# Altium PCB remote.PcbDoc (part 1 of 2)
Units mm, origin at the board's own origin, x right, y up, seen from the top; angles counter-clockwise.
Board outline 152.4 x 101.6 mm, 2 copper layers (Top Layer, Bottom Layer); 61 components, 51 nets, 242 pads, 145 vias.
Unrouted connection lines stored in the file: 18.
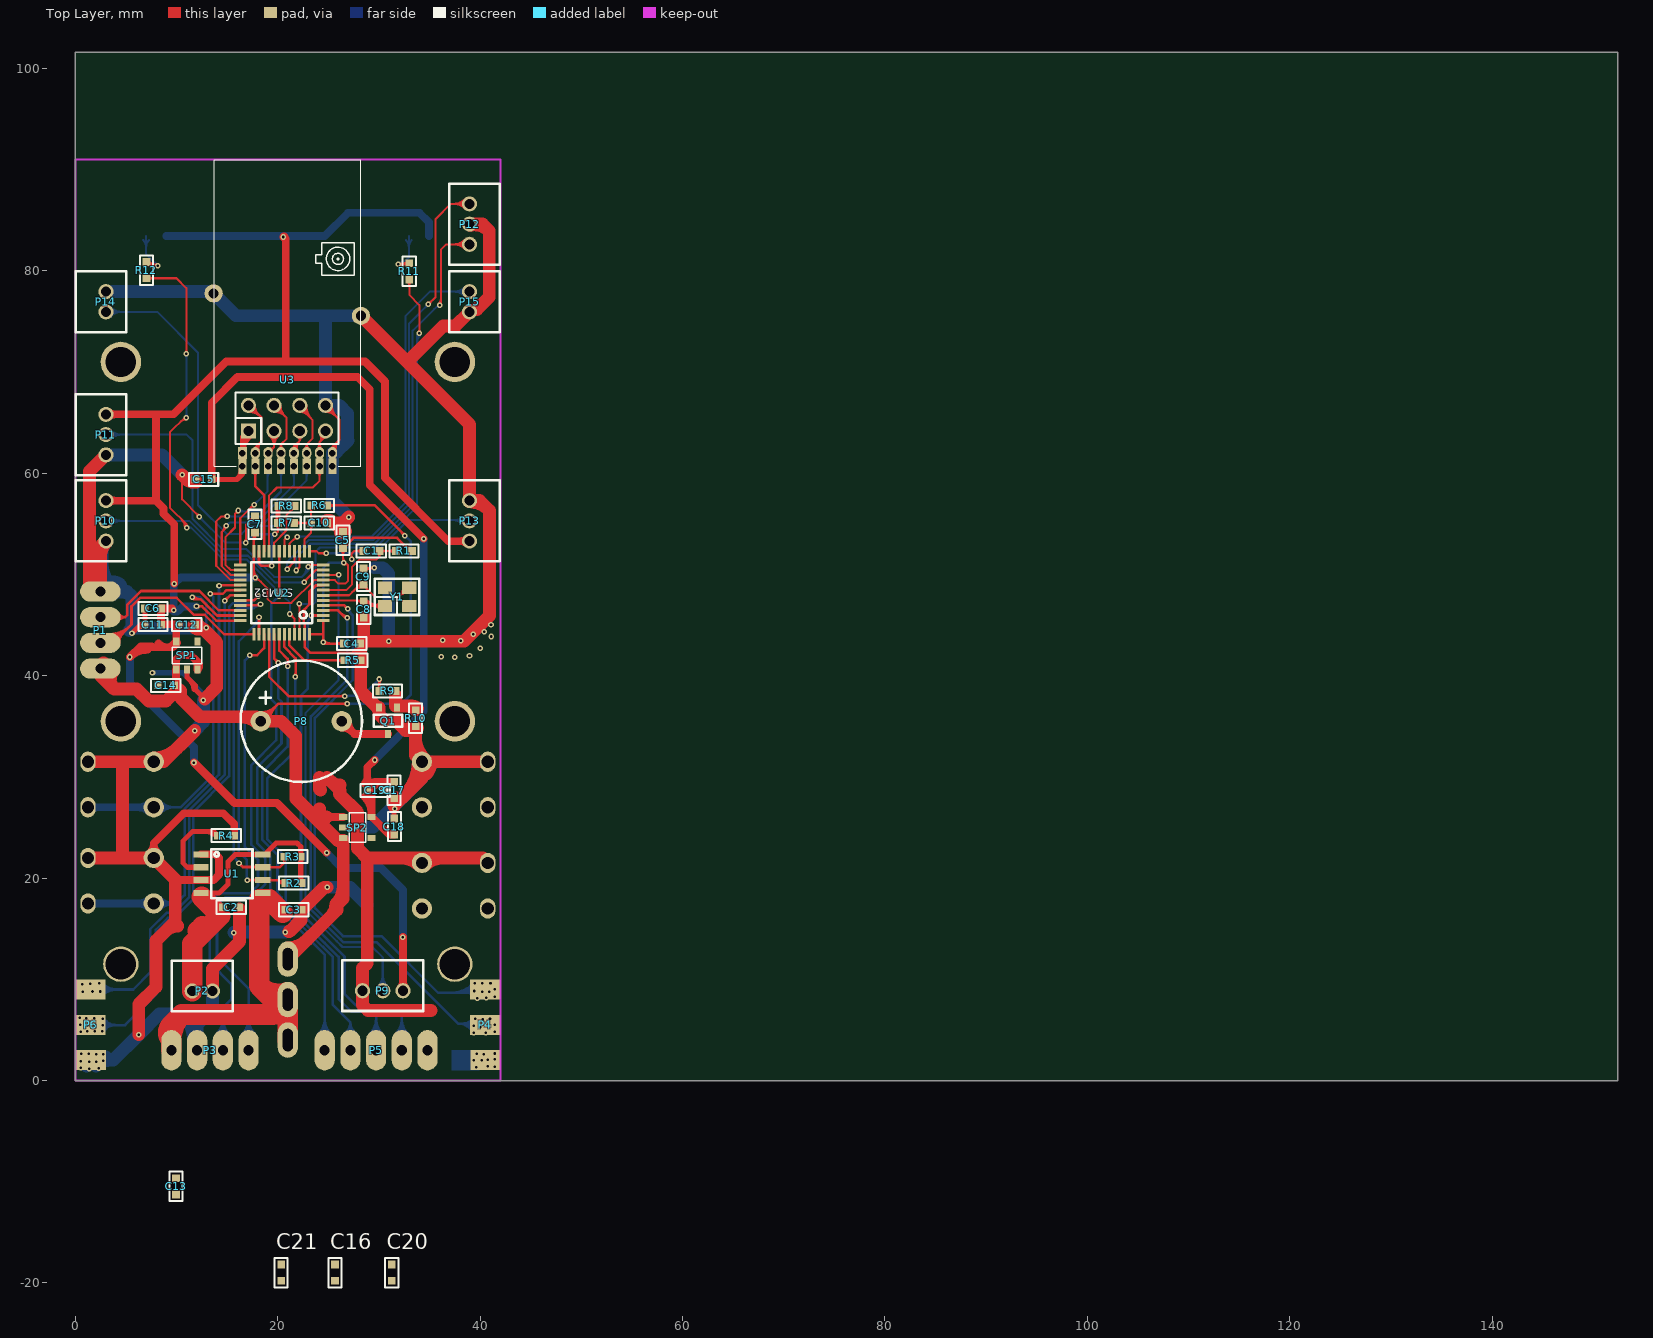
[diagram p0: Top Layer view]
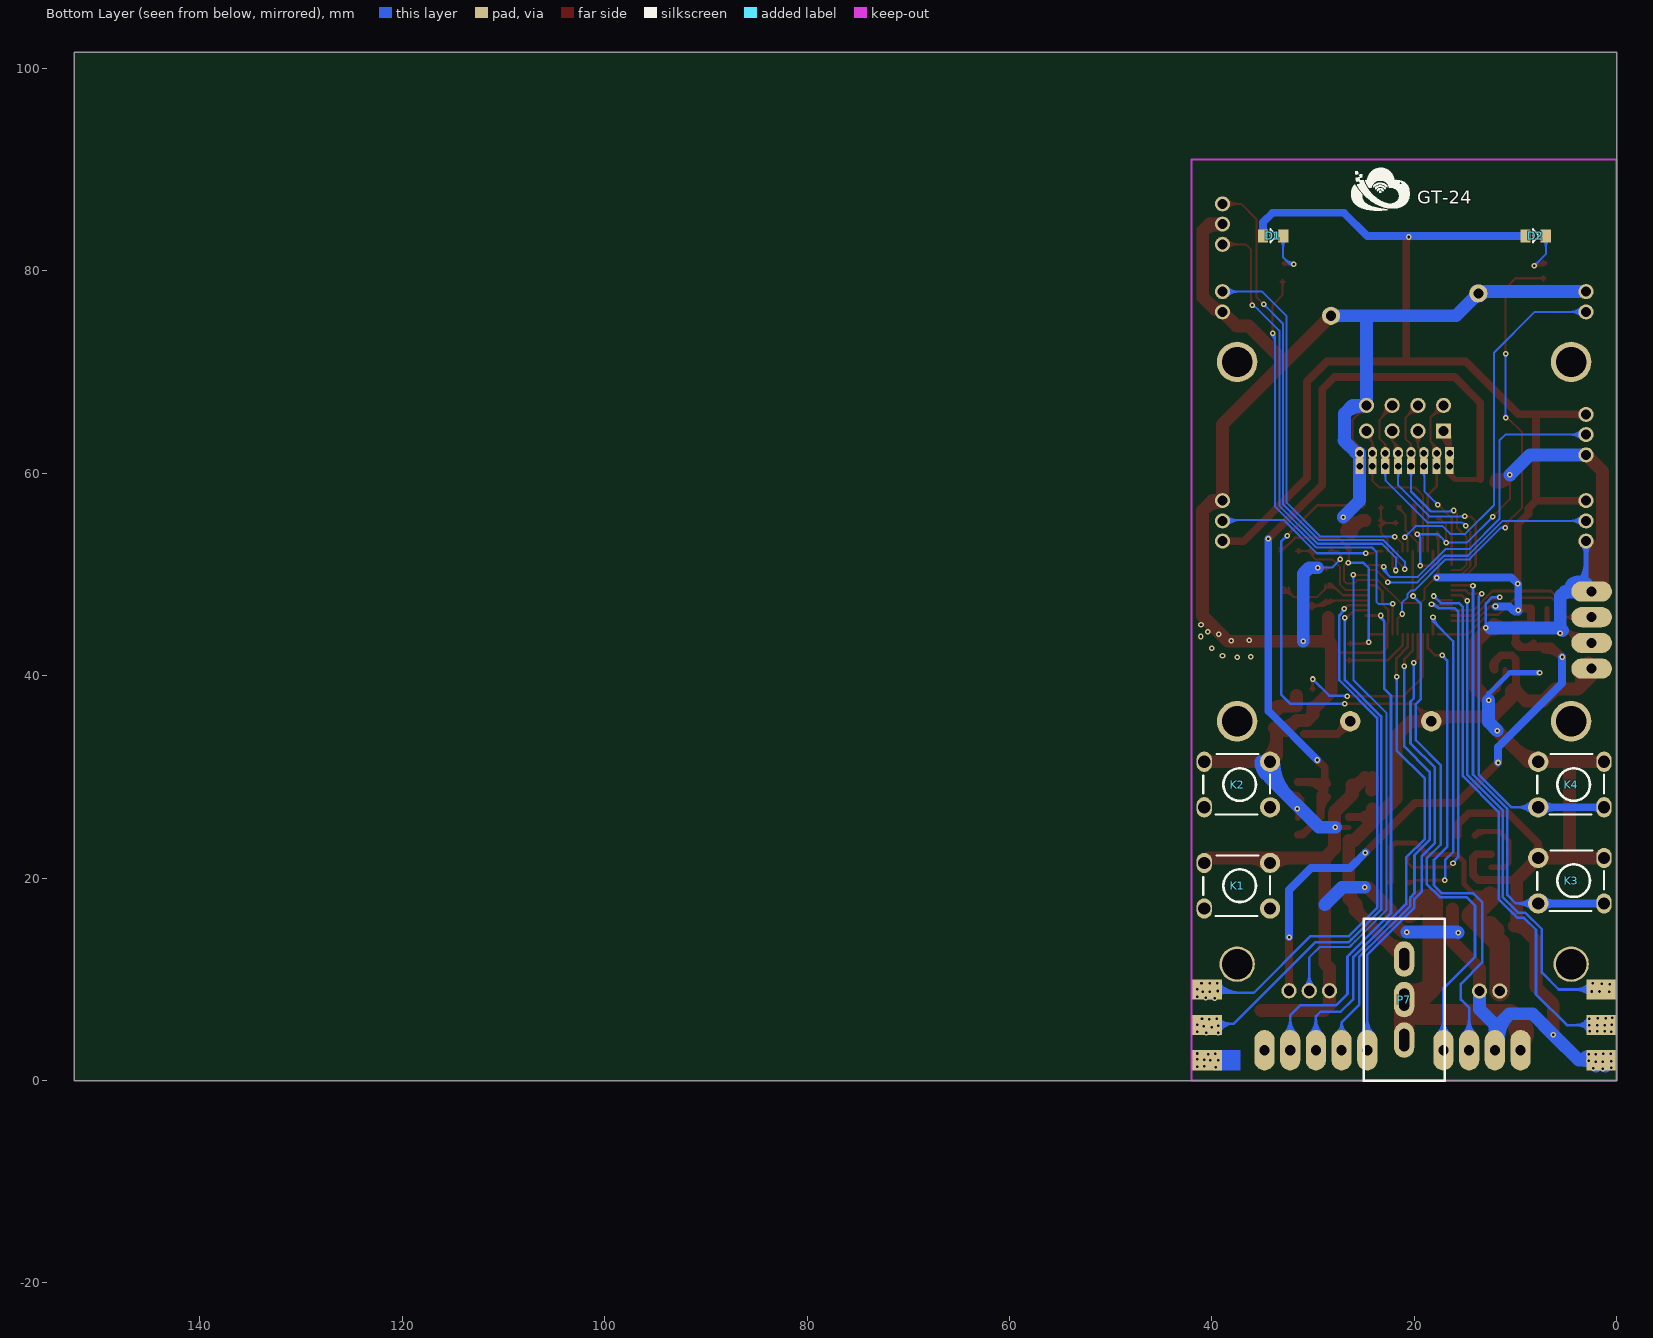
[diagram p1: Bottom Layer view, seen from below]

## Layer stack, top to bottom
Top Layer: signal copper 0.0356
Dielectric: dielectric 0.32, FR-4, Dk 4.8
Bottom Layer: signal copper 0.0356

## Board outline
0,0 152.4,0 152.4,101.6 0,101.6

## Design rules (kind name [scope] priority, off if disabled: settings)
AssemblyTestPointUsage [All] p1 off:
AssemblyTestpoint [All] p1 off: testpointundercomponent=TRUE minsize=1.016 maxsize=2.54 preferedsize=1.524 minholesize=0 maxholesize=1.016 preferedholesize=0.813 testpointgrid=0.025 usegrid=TRUE gridtolerance=0 allowsidetop=TRUE allowsidebottom=TRUE
Clearance [All] p1: gap=0.152
ComponentClearance [All] p1 off: gap=0.254 collisioncheckmode=3 verticalgap=0.254 showdistances=FALSE
FabricationTestPointUsage [All] p1 off: valid=0 allowmultiple=FALSE
FabricationTestpoint [All] p1 off: side=3 testpointundercomponent=TRUE minsize=1.016 maxsize=2.54 preferedsize=1.524 minholesize=0 maxholesize=1.016 preferedholesize=0.813 testpointgrid=0.025 allowsidetop=TRUE allowsidebottom=TRUE usegrid=TRUE gridtolerance=0
Height [All] p1 off: minheight=0 maxheight=25.4 prefheight=12.7
HoleSize [All] p1 off: absolutevalues=TRUE maxlimit=2.54 minlimit=0.025 maxpercent=80.000 minpercent=20.000
HoleToHoleClearance [All] p1 off: gap=0.025 allowstackedmicrovias=TRUE
LayerPairs [All] p1 off: enforce=TRUE
MinimumSolderMaskSliver [All] p1 off: minsoldermaskwidth=0.025
NetAntennae [All] p1 off: netantennaetolerance=0
PolygonConnect [All] p1: connectstyle=Relief reliefconductorwidth=0.254 reliefentries=4 polygonreliefangle="90 Angle" airgapwidth=0.254
RoutingVias [All] p1: holewidth=0.25 width=0.55 viastyle="Through Hole" minholewidth=0.25 minwidth=0.55 maxholewidth=0.711 maxwidth=1.27
SilkToSilkClearance [All] p1 off: silktosilkclearance=0.254
SilkToSolderMaskClearance [IsPad] p1 off: minsilkscreentomaskgap=0.025 clearancetoexposedcopper=TRUE
SolderMaskExpansion [All] p1: expansion=0.102
Width [All] p1: maxlimit=2.54 minlimit=0.178 preferedwidth=0.178 minimp=50.000000 maximp=50.000000 favimp=50.000000
15 further rules are at their usual default settings.

## Components (designator, comment, footprint, x,y, rotation, side; value= is the part's Value field where it differs from the comment)
C1 "C10uF" 0603C 30.05,52.325 r180 top
C2 "C10uF" 0603C 14.6,17.125 r0 top
C3 "C10uF" 0603C 20.775,16.875 r0 top
C4 "C0.1uF" 0603C 28.125,43.175 r180 top
C5 "C0.1uF" 0603C 26.45,54.2 r270 top
C6 "C0.1uF" 0603C 6.875,46.65 r0 top
C7 "C0.1uF" 0603C 17.75,55.75 r270 top
C8 "C22pF" 0603R 28.5,45.75 r90 top
C9 "C22pF" 0603R 28.475,50.6 r270 top
C10 "C10uF" 0603C 23.3,55.1 r0 top
C11 "C0.1uF" 0603C 6.875,45.05 r0 top
C12 "C10uF" 0603C 10.225,45.05 r0 top
C13 "22uF" 0603C 9.95,-9.65 r270 top
C14 "22uF" 0603C 9.75,39.05 r180 top
C15 "C0.1uF" 0603C 11.875,59.4 r0 top
C16 "C10uF" 0603C 25.665,-19.783 r90 top
C17 "C0.1uF" 0603C 31.5,27.9 r90 top
C18 "C10uF" 0603C 31.525,24.3 r90 top
C19 "22uF" 0603C 28.85,28.675 r0 top
C20 "22uF" 0603C 31.265,-19.783 r90 top
C21 "C10uF" 0603C 20.34,-19.783 r90 top
D1 "LED" LED 34.95,83.45 r180 bottom locked
D2 "LED" LED 9,83.45 r180 bottom locked
K1 "KEY-PB" SW-DIP#1 40.75,17 r0 bottom locked
K2 "KEY-PB" SW-DIP#1 40.75,27 r0 bottom locked
K3 "KEY-PB" SW-DIP#2 7.75,17.5 r0 bottom locked
K4 "KEY-PB" SW-DIP#2 7.75,27 r0 bottom locked
P1 "Head*4" Head4_SPE4 2.475,48.325 r270 top
P2 "Head2" HEAD-2P-2.0 11.55,8.85 r0 top locked
P3 "Head*4" Head4_SPE4 9.5,3 r0 top locked
P4 "head*3" KEY_SPE2 40.5,2 r0 top locked
P5 "HEAD5" HEAD5_SPE5 24.64,3 r0 top locked
P6 "head*3" KEY_SPE2 1.5,2 r0 top locked
P7 "head*3" SWITCH_3P 21,4 r180 bottom locked
P8 "Head2" BEEP 18.325,35.5 r0 top
P9 "head*3" HEAD-3P-2.0 28.375,8.875 r0 top locked
P10 "head*3" HEAD-3P-2.0 3.025,53.3 r90 top locked
P11 "head*3" HEAD-3P-2.0 3.025,61.825 r90 top locked
P12 "head*3" HEAD-3P-2.0 38.95,86.625 r270 top locked
P13 "head*3" HEAD-3P-2.0 38.95,57.3 r270 top locked
P14 "Head2" HEAD-2P-2.0 3.025,75.95 r90 top locked
P15 "Head2" HEAD-2P-2.0 38.95,77.95 r270 top locked
Q1 "SI2302" SOT-23-3 31.8,36.85 r180 top
R1 "R10K" 0603R 31.675,52.325 r0 top
R2 "R1K" 0603R 20.775,19.512 r0 top
R3 "R1K" 0603R 20.675,22.125 r0 top
R4 "1K" 0603R 15.7,24.2 r180 top
R5 "R10K" 0603R 26.6,41.525 r0 top
R6 "R10K" 0603R 24.9,56.825 r180 top
R7 "R10K" 0603R 20.025,55.1 r0 top
R8 "1K" 0603R 20.05,56.775 r0 top
R9 "R100R" 0603R 31.65,38.5 r180 top
R10 "R10K" 0603R 33.625,36.6 r270 top
R11 "R1K" 0603R 33,80.75 r270 top
R12 "R1K" 0603R 7.025,80.875 r270 top
SP1 "SP6201-adj" SOT23-5 9.975,40.6 r0 top
SP2 "SP6201-adj" SOT23-5 26.475,26.05 r270 top
U1 "TP4056" SOP-8 12.425,22.35 r0 top
U2 "STM32F103C8T6" STM32C8T6 19.55,46.3 r0 top
U3 "NRF_PA" NRF_PA 17.1,64.175 r0 top locked
Y1 "12M" XTAL3225 30.6,46.9 r0 top

## Footprints (in the part's own frame and the unit in brackets; to place one, negate y for a bottom-side part, rotate by r counter-clockwise, add the part's x,y. Pads: shape width x height; smd on the part's side, far side on the other; paste and mask are expansions set on the pad)
0603C [mil]
  rect 30x30 smd: 1(0,0) 2(62.99,0)
  silkscreen extent -26,-26 89,26
0603R [mil]
  rect 30x30 smd: 1(0,0) 2(62.99,0)
  silkscreen extent -26,-26 89,26
BEEP [mm]
  round 2 hole 1: 1(0,0) 2(8,0)
  silkscreen extent -2,-6 10,6
Head4_SPE4 [mm]
  oval 2x4 hole 1: 1(0,0) 2(2.54,0) 3(5.08,0) 4(7.62,0)
HEAD5_SPE5 [mm]
  oval 2x4 hole 1: 1(0,0) 2(2.54,0) 3(5.08,0) 4(7.62,0) 5(10.16,0)
HEAD-2P-2.0 [mm]
  round 1.5 hole 1: 1(0,0) 2(2,0)
  silkscreen extent -2,-2 4,3
HEAD-3P-2.0 [mm]
  round 1.5 hole 1: 1(0,0) 2(2,0) 3(4,0)
  silkscreen extent -2,-2 6,3
KEY_SPE2 [mm]
  rect 3x2 smd far side: 1(0,0) 2(0,3.5) 3(0,7)
  rect 3x2 smd: 1(0.05,0.025) 2(0,3.5) 3(0,7)
LED [mil]
  rect 40x50 smd: 1(0,0) 2(78.74,0)
  silkscreen extent 29,-25 49,27
NRF_PA [mm]
  rect 0.8x1.5 hole 0.65: 1(-0.585,-3.48) 2(0.685,-3.48) 3(1.955,-3.48) 4(3.225,-3.48) 5(4.495,-3.48) 6(5.765,-3.48) 7(7.035,-3.48) 8(8.305,-3.48)
  rect 0.9x1.2 hole 0.65: 1(-0.585,-2.18)
  rect 1.5x1.5 hole 1: 1(0,0)
  round 1.5 hole 1: 2(0,2.54) 3(2.54,0) 4(2.54,2.54) 5(5.08,0) 6(5.08,2.54) 7(7.62,0) 8(7.62,2.54)
  oval 0.9x1.2 hole 0.65: 2(0.685,-2.18) 3(1.955,-2.18) 4(3.225,-2.18) 6(5.765,-2.18) 7(7.035,-2.18) 8(8.305,-2.18)
  oval 1x1.2 hole 0.65: 5(4.495,-2.18)
  round 1.8 hole 1: 9(-3.429,13.604) 10(11.123,11.39)
  silkscreen extent -3.39,-3.47 11.11,26.82
SOP-8 [mm]
  rect 1.5x0.6 smd: 1(0,0) 2(0,-1.27) 3(0,-2.54) 4(0,-3.81) 5(6.096,-3.81) 6(6.096,-2.54) 7(6.096,-1.27) 8(6.096,0)
  silkscreen extent 1.02,-4.32 5.08,0.51
SOT23-5 [mm]
  rect 0.6x0.8 smd: 1(0,0) 2(1.05,0) 3(2.1,0) 4(2.1,2.8) 5(0,2.8)
  silkscreen extent -0.4,0.6 2.5,2.2
SOT-23-3 [mm]
  rect 0.6x0.8 smd: 1(0,0) 2(1.8,0) 3(0.9,2.6)
  silkscreen extent -0.5,0.7 2.3,1.9
STM32C8T6 [mm]
  rect 1.2x0.3 smd: 1(4.95,-0.85) 2(4.95,-0.35) 3(4.95,0.15) 4(4.95,0.65) 5(4.95,1.15) 6(4.95,1.65) 7(4.95,2.15) 8(4.95,2.65) 9(4.95,3.15) 10(4.95,3.65) 11(4.95,4.15) 12(4.95,4.65) 25(-3.25,4.65) 26(-3.25,4.15) 27(-3.25,3.65) 28(-3.25,3.15) 29(-3.25,2.65) 30(-3.25,2.15) 31(-3.25,1.65) 32(-3.25,1.15) 33(-3.25,0.65) 34(-3.25,0.15) 35(-3.25,-0.35) 36(-3.25,-0.85)
  rect 0.3x1.2 smd: 13(3.6,6) 14(3.1,6) 15(2.6,6) 16(2.1,6) 17(1.6,6) 18(1.1,6) 19(0.6,6) 20(0.1,6) 21(-0.4,6) 22(-0.9,6) 23(-1.4,6) 24(-1.9,6) 37(-1.9,-2.2) 38(-1.4,-2.2) 39(-0.9,-2.2) 40(-0.4,-2.2) 41(0.1,-2.2) 42(0.6,-2.2) 43(1.1,-2.2) 44(1.6,-2.2) 45(2.1,-2.2) 46(2.6,-2.2) 47(3.1,-2.2) 48(3.6,-2.2)
  silkscreen extent -2.16,-1.1 3.86,4.92
SW-DIP#1 [mm]
  round 2 hole 1.2: 1(-6.5,0) 2(-6.5,-4.5)
  oval 1.5x2 hole 1.2: 1(0,0) 2(0,-4.5)
  silkscreen extent -6.5,-5.25 0.1,0.72
SW-DIP#2 [mm]
  oval 1.5x2 hole 1.2: 1(-6.5,0) 2(-6.5,-4.5)
  round 2 hole 1.2: 1(0,0) 2(0,-4.5)
  silkscreen extent -6.5,-5.25 0.1,0.73
SWITCH_3P [mm]
  oval 2x3.5 hole 1 slot 2.2 at 90 deg: 1(0,0) 2(0,4) 3(0,8)
  silkscreen extent -4,-4 4,12
XTAL3225 [mm]
  rect 1.4x1.2 smd: 1(0,0) 2(2.4,0) 3(2.4,1.8) 4(0,1.8)
  silkscreen extent -1,-0.9 3.4,2.7

## Part data
C13 C14 C19 C20: library part C100uF
Q1: library part MOSFET-N
R4: library part R1K
R6 R7: library part R100K
R8: library part R10K
SP1 SP2: library part SP6201
Y1: library part CRYSTAL, "Crystal"

## Free pads (board coordinates)
  round 3.5 hole 3: 0(4.5,11.5) 0(37.5,11.5)
  round 4 hole 3: 0(4.5,35.5) 0(4.5,71) 0(37.5,35.5) 0(37.5,71)

## Via types
v1: diameter 0.55, hole 0.25, Top Layer to Bottom Layer, tented both sides, 145 vias

## Nets (pads, with @x,y where several pads share a name; then routed paths per layer and width w, separated by ;. In a path a pad name is that pad's centre, name@x,y a point inside that pad or via, vN(x,y) a via of type N, cw(c..) or ccw(c..) an arc to the next point about the centre after c; other vN are vias at no path point)
2V8: C4.2 C5.2 C6.2 C7.2 C11.2 C16.1 C20.1 D1.1 D2.1 P9.3 P10.3 P11.3 P13.3 R1.2 SP1.5 U2.1 U2.9 U2.24 U2.36 U2.48 | length 258.9
  Top Layer w0.203: v1@17.775,49.527 cw(c17.775,48.746) 18.327,49.298 ; v1(17.775,49.7) 17.925,49.7 18.975,48.65 18.975,47.625 19.4,47.2 21.35,47.2 23.6,49.45 U2.9@24.5,49.45 25.65,49.45 26,49.1 26.675,49.1 26.925,49.35 26.925,50.938 ; C5.2@26.252,52.402 cw(c25.775,51.925) 26.45,51.925 cw(c27.125,51.925) C5.2@26.648,52.402 ; v1@26.45,51.413 C5.2@26.45,52.6 ; 26.45,51.75 ccw(c27.125,51.75) v1@26.648,51.273 ; v1@26.6,50.993 cw(c26.723,50.735) 26.925,50.938 ; v1@26.619,51.244 26.925,50.938
  Top Layer w0.254: v1@9.55,46.475 v1(9.725,46.475) ; v1(11.975,46.85) 12.525,46.85 13.925,45.45 U2.36@16.3,45.45 ; v1@12.08,46.745 cw(c12.332,46.493) 12.332,46.85 cw(c12.332,47.207) v1@12.08,46.955 ; C7.2@17.57,53.97 cw(c17.378,53.778) C7.2@17.65,53.778 ; 17.65,50.359 ccw(c18.434,50.359) v1@17.88,49.805 ; 17.65,53.295 cw(c18.605,53.295) C7.2@17.93,53.97 ; C7.2@17.75,54.15 17.65,54.05 U2.24@17.65,52.3 17.65,49.825 v1(17.775,49.7) ; U2.48@23.15,44.1 24.4,44.1 24.5,44.2 ; v1@24.395,43.43 ccw(c24.143,43.682) 24.5,43.682 ccw(c24.857,43.682) 24.605,43.43 ccw(c25.219,44.045) 25.219,43.175 ; U2.1@24.5,45.45 24.5,44.2 ; C4.2@26.345,42.995 ccw(c25.912,42.562) 25.912,43.175 ccw(c25.912,43.788) C4.2@26.345,43.355 ; C5.2@26.45,52.6 27.475,53.625 31.8,53.625 33.1,52.325 R1.2@33.275,52.325 ; C5.2@26.45,52.854 ccw(c26.45,53.467) 26.884,53.034 ccw(c27.317,52.6) C5.2@26.704,52.6 ; C4.2@26.525,43.175 24.65,43.175 v1(24.5,43.325) 24.5,44.2 ; 32.543,52.882 ccw(c33.275,53.615) R1.2@33.275,52.579
  Top Layer w0.762: P10.3@3.025,57.3 7.975,57.3 ; P11.3@3.025,65.825 9.7,65.825 14.925,71.05 20.8,71.05 ; P10.3@3.286,57.039 cw(c3.916,56.409) 3.916,57.3 cw(c3.916,58.191) P10.3@3.286,57.561 ; P11.3@3.286,65.564 cw(c3.916,64.934) 3.916,65.825 cw(c3.916,66.716) P11.3@3.286,66.086 ; 7.144,42.556 ccw(c7.105,40.145) v1(5.4,41.85) 6.475,42.925 7.55,42.925 7.675,42.8 9.375,42.8 ; 7.975,65.675 7.975,57.3 ; 8.211,43.186 ccw(c9.143,44.118) 9.143,42.8 ; 8.963,42.8 ccw(c8.963,44.312) SP1.5@10.032,43.243 ; v1@9.55,46.65 C6.2@8.475,46.65 C11.2@8.475,45.05 8.5,45.075 9.975,45.075 SP1.5@9.975,43.4 9.375,42.8 ; v1(9.775,49.075) 9.775,54.952 8.715,56.012 8.715,56.56 7.975,57.3 ; 9.975,44.447 cw(c10.828,44.447) 10.225,45.05 ; SP1.5@10.051,43.272 cw(c9.375,43.52) 9.375,42.8 ; v1(11.725,31.425) 15.725,27.425 19.925,27.425 v1(24.825,22.525) ; v1(20.55,83.35) 20.8,83.1 20.8,71.05 ; P9.3@32.114,9.136 ccw(c31.484,9.766) 32.375,9.766 ccw(c33.266,9.766) P9.3@32.636,9.136 ; P9.3@32.375,8.875 v1(32.375,14.175) ; P13.3@38.689,53.039 ccw(c38.059,52.409) 38.059,53.3 ccw(c38.059,54.191) P13.3@38.689,53.561 ; P13.3@38.95,53.3 36.85,53.3 30.6,59.55 30.6,69.075 28.625,71.05 20.8,71.05 ; v1@20.625,83.425 cw(c20.202,83.002) 20.8,83.002 ccw(c20.202,83.002) v1@20.625,83.425
  Bottom Layer w0.254: v1@24.395,43.43 ccw(c24.143,43.682) 24.5,43.682 ccw(c24.857,43.682) v1@24.605,43.43 ; v1(24.5,43.325) 24.5,50.625 25.025,51.15 v1(26.525,51.15) ; v1@26.42,51.045 ccw(c26.168,50.793) 26.168,51.15 ccw(c26.168,51.507) v1@26.42,51.255
  Bottom Layer w0.762: P11.3@3.025,65.825 P11.3@3.025,65.925 ; v1(5.4,41.85) 5.4,39.275 11.725,32.95 v1(11.725,31.425) ; D2.1@9,83.45 24.65,83.45 26.95,85.75 34,85.75 34.95,84.8 D1.1@34.95,83.45 ; v1@9.678,46.38 ccw(c9.898,46.827) 10.25,46.475 ; v1@9.725,46.369 ccw(c9.725,47.381) 10.44,46.665 ; v1@9.725,49.025 v1(9.725,46.475) 10.25,46.475 ; v1(9.775,49.075) 10.408,49.708 17.767,49.708 v1(17.775,49.7) ; v1(11.975,46.85) 10.625,46.85 10.25,46.475 ; v1(24.825,22.525) 26.35,21 30.2,21 32.375,18.825 v1(32.375,14.175)
4V3: C12.1 C14.1 C21.1 P1.4 P7.3 P8.1 R6.1 SP1.1 SP1.3 SP2.1 SP2.3 | length 124.2
  Top Layer w0.254: P8.1@18.325,35.5 20.05,37.225 v1(26.85,37.225) ; P8.1@18.325,36.119 ccw(c18.325,37.613) 19.382,36.557 ccw(c20.438,35.5) P8.1@18.944,35.5 ; P8.1@18.325,36.373 ccw(c18.325,38.481) 19.815,36.99 ccw(c21.306,35.5) P8.1@19.198,35.5 ; R6.1@24.9,56.825 29.6,56.825 32.425,54 v1@32.425,53.875 ; R6.1@25.08,56.645 cw(c25.513,56.212) 25.513,56.825 cw(c25.513,57.438) R6.1@25.08,57.005 ; v1@26.745,37.12 ccw(c26.493,36.868) 26.493,37.225 ccw(c26.493,37.582) v1@26.745,37.33 ; 32.28,54.145 cw(c31.984,53.85) v1@32.402,53.85 ; 32.34,54.085 ccw(c32.55,54.295) v1@32.55,53.998
  Top Layer w0.762: C14.1@9.95,39.374 ccw(c10.974,39.374) 10.25,38.65 9.95,38.95 SP1.1@9.95,40.575 ; SP1.1@9.975,40.6 9.975,41.625 10.375,42.025 11.425,42.025 12.075,41.375 ; 11.736,41.714 cw(c10.722,40.7) SP1.3@12.156,40.7 ; SP1.3@12.075,40.6 12.075,41.375 ; SP1.3@12.142,40.654 ccw(c11.674,40.974) 12.075,41.375 ; 24.825,26.05 SP2.1@26.475,26.05
  Top Layer w1.27: P1.4@2.475,40.705 2.475,40.05 3.85,38.675 ; P1.4@2.773,41.276 ccw(c3.704,40.519) 2.855,39.67 ; P1.4@3.758,40.475 ccw(c4.801,39.626) 3.85,38.675 ; 16.357,35.95 cw(c16.357,33.532) P8.1@18.067,35.242 ; P7.3@21,12 25.85,16.85 25.85,17.375 26.475,18 26.475,23.186 ; P7.3@21,13.115 ccw(c21,15.807) 22.903,13.903 ; 24.125,26.85 24.125,25.925 24.1,25.9 24.675,25.9 24.825,26.05 ; 25.282,16.282 ccw(c24.19,17.375) 25.735,17.375 ; 25.769,17.456 ccw(c24.064,19.161) 26.475,19.161 ; SP2.3@26.475,23.725 25.936,23.725 21.775,27.886 21.775,34.05 20.325,35.5 P8.1@18.325,35.5 17.875,35.95 12.3,35.95 10.425,37.825 10.425,38.475 10.25,38.65 10.1,38.65 8.95,37.5 7.25,37.5 6.075,38.675 3.85,38.675 ; 9.996,38.65 ccw(c10.952,38.65) 10.276,37.974 cw(c10.952,38.65) 9.996,38.65
  Bottom Layer w0.254: v1(26.85,37.225) 32.225,37.225 33.152,38.152 33.152,53.248 v1(32.55,53.85) ; v1@26.955,37.12 cw(c27.207,36.868) 27.207,37.225 cw(c27.207,37.582) v1@26.955,37.33 ; v1@32.55,53.702 cw(c32.55,53.345) 32.803,53.597 cw(c33.055,53.85) v1@32.698,53.85
AD0: P9.2 U2.10 | length 61.3
  Top Layer w0.203: U2.10@24.5,49.95 26,49.95 v1(26.025,49.975) ; 25.546,49.95 ccw(c25.546,50.454) v1@25.902,50.098 ; 25.667,49.95 cw(c25.667,49.617) v1@25.902,49.852
  Bottom Layer w0.203: v1@25.902,49.852 cw(c25.606,49.556) 26.025,49.556 cw(c26.444,49.556) v1@26.148,49.852 ; v1(26.025,49.975) 26.025,39.575 22.725,36.275 22.725,16.888 25.834,13.779 25.834,13.766 26.4,13.2 29.35,13.2 30.375,12.175 P9.2@30.375,8.875 30.375,11.7 ; 30.375,9.95 ccw(c31.45,9.95) 30.69,9.19 cw(c31.45,9.95) 30.375,9.95 ; 30.375,9.95 cw(c29.3,9.95) 30.06,9.19 ccw(c29.3,9.95) 30.375,9.95 ; 30.375,10.44 ccw(c31.94,10.44) 30.833,9.333 cw(c31.94,10.44) 30.375,10.44 ; 30.375,10.44 cw(c28.81,10.44) 29.917,9.333 ccw(c28.81,10.44) 30.375,10.44
AD1: P10.2 U2.11 | length 30
  Top Layer w0.203: v1(22.601,49.227) 22.601,49.276 23.775,50.45 U2.11@24.5,50.45 ; v1@22.601,49.401 ccw(c22.601,49.702) 22.814,49.489 ; v1@22.775,49.227 cw(c23.311,49.227) 22.932,49.607
  Bottom Layer w0.203: P10.2@3.025,55.3 11.272,55.3 14.715,51.857 17.065,51.857 19.695,49.227 v1(22.601,49.227) ; P10.2@3.34,54.985 cw(c4.1,54.225) 4.1,55.3 cw(c4.1,56.375) P10.2@3.34,55.615 ; P10.2@3.483,54.841 cw(c4.59,53.735) 4.59,55.3 cw(c4.59,56.865) P10.2@3.483,55.758 ; v1@22.478,49.105 ccw(c22.182,48.809) 22.182,49.227 ccw(c22.182,49.646) v1@22.478,49.35
AD2: P11.2 U2.12 | length 40.1
  Top Layer w0.203: v1@23.004,50.796 cw(c23.376,50.424) 23.376,50.95 ; v1(23.025,50.775) 23.2,50.95 U2.12@24.5,50.95 ; v1@23.148,50.652 cw(c23.866,49.934) 23.866,50.95
  Bottom Layer w0.203: P11.2@3.025,63.825 11,63.825 11.575,63.25 11.575,55.5 14.564,52.511 16.914,52.511 19.65,49.775 22.4,49.775 23.025,50.4 ; P11.2@3.34,63.51 cw(c4.1,62.75) 4.1,63.825 cw(c4.1,64.9) P11.2@3.34,64.14 ; P11.2@3.483,63.366 cw(c4.59,62.26) 4.59,63.825 cw(c4.59,65.39) P11.2@3.483,64.283 ; 22.464,49.839 ccw(c21.528,50.775) v1@22.852,50.775 ; 22.811,50.186 ccw(c22.221,50.775) v1@23.055,50.775 ; v1@22.913,50.643 cw(c22.706,50.4) 23.025,50.4 ; v1(23.025,50.775) 23.025,50.4 ; v1@23.137,50.643 ccw(c23.344,50.4) 23.025,50.4
AD3: P13.2 U2.13 | length 23.5
  Top Layer w0.203: U2.13@23.15,52.3 23.85,52.3 24.05,52.1 v1(24.775,52.1) ; v1@24.652,51.977 ccw(c24.356,51.681) 24.356,52.1 ccw(c24.356,52.519) v1@24.652,52.223
  Bottom Layer w0.203: v1(24.775,52.1) 29.625,52.1 32.925,55.4 38.85,55.4 P13.2@38.95,55.3 ; v1@24.898,51.977 cw(c25.194,51.681) 25.194,52.1 cw(c25.194,52.519) v1@24.898,52.223 ; 37.143,55.4 cw(c37.143,53.493) P13.2@38.492,54.841 ; 37.626,55.4 ccw(c37.626,56.624) P13.2@38.492,55.758 ; 37.634,55.4 cw(c37.634,53.984) P13.2@38.635,54.985 ; 38.117,55.4 ccw(c38.117,56.133) P13.2@38.635,55.615 ; 38.124,55.4 cw(c38.124,54.474) P13.2@38.779,55.129
AD-BAT: C10.1 R6.2 R7.2 U2.14 | length 11.8
  Top Layer w0.203: R7.2@21.625,55.1 C10.1@23.3,55.1 ; R7.2@21.823,54.902 cw(c22.3,54.425) 22.3,55.1 cw(c22.3,55.775) R7.2@21.823,55.298 ; U2.14@22.65,52.3 22.65,53.5 23.3,54.15 C10.1@23.3,55.1 ; R6.2@23.102,56.627 cw(c22.625,56.15) 23.3,56.15 cw(c23.975,56.15) R6.2@23.498,56.627 ; R6.2@23.3,56.825 C10.1@23.3,55.1 ; C10.1@23.498,54.902 ccw(c23.975,54.425) 23.3,54.425 ccw(c22.625,54.425) 23.102,54.902 ccw(c22.625,54.425) 22.625,55.1 ccw(c22.625,55.775) 23.102,55.298 ccw(c22.625,55.775) 23.3,55.775 ccw(c23.975,55.775) C10.1@23.498,55.298
BEEP: R9.2 U2.40 | length 20.8
  Top Layer w0.254: U2.40@19.15,44.1 19.15,39.9 21.073,37.977 v1(26.626,37.977) ; v1@26.522,37.872 ccw(c26.269,37.62) 26.269,37.977 ccw(c26.269,38.334) v1@26.522,38.082 ; R9.2@29.87,38.68 ccw(c29.437,39.113) 30.05,39.113 ccw(c30.663,39.113) R9.2@30.23,38.68 ; v1@29.945,39.57 cw(c29.693,39.318) 30.05,39.318 cw(c30.407,39.318) v1@30.155,39.57 ; R9.2@30.05,38.5 v1(30.05,39.675)
  Bottom Layer w0.254: v1(26.626,37.977) 26.674,38.025 28.4,38.025 v1(30.05,39.675) ; v1@26.731,37.872 cw(c27.1,37.503) 27.1,38.025 ; v1@29.902,39.675 cw(c29.545,39.675) 29.797,39.422 cw(c30.05,39.17) v1@30.05,39.527
CE: U2.22 U3.2 | length 22.6
  Top Layer w0.203: U3.2@17.1,66.067 cw(c17.1,64.236) 18.395,65.53 ; U3.2@17.1,66.27 cw(c17.1,64.929) 18.048,65.877 ; U3.2@17.1,66.473 cw(c17.1,65.623) 17.701,66.224 ; U3.2@17.1,66.715 17.21,66.715 18.4,65.525 18.4,63.175 ; U3.2@17.545,66.715 ccw(c18.354,66.715) 17.782,66.143 ; U3.2@17.728,62.132 cw(c18.277,62.257) 17.879,62.654 ; U3.2@17.748,66.715 ccw(c19.048,66.715) 18.129,65.796 ; U3.2@17.785,61.995 17.785,62.56 18.4,63.175 ; U3.2@17.927,62.177 cw(c18.701,62.353) 18.14,62.915 ; U3.2@18.125,62.222 cw(c19.126,62.449) 18.4,63.175
  Top Layer w0.254: U3.2@17.592,60.152 cw(c17.126,59.686) 17.785,59.686 cw(c18.444,59.686) U3.2@17.978,60.152 ; U3.2@17.785,60.695 17.785,58.715 18.65,57.85 U2.22@18.65,52.3
CH5-0: P12.3 U2.15 | length 53.3
  Top Layer w0.203: v1(21.825,50.4) 22.15,50.725 U2.15@22.15,52.3 ; v1@21.825,50.573 ccw(c21.825,50.992) 22.121,50.696 ccw(c22.417,50.4) v1@21.998,50.4 ; v1@35.877,76.748 ccw(c35.28,77.345) 36.125,77.345 ; v1(36,76.625) 36.125,76.75 36.125,82.1 36.65,82.625 P12.3@38.95,82.625 ; P12.3@38.492,82.167 ccw(c37.385,81.06) 37.385,82.625 ccw(c37.385,84.19) P12.3@38.492,83.083 ; P12.3@38.635,82.31 ccw(c37.875,81.55) 37.875,82.625 ccw(c37.875,83.7) P12.3@38.635,82.94
  Bottom Layer w0.203: v1@21.702,50.523 ccw(c21.406,50.819) 21.825,50.819 ccw(c22.244,50.819) v1@21.948,50.523 ; v1(21.825,50.4) 21.825,51.675 23.189,53.039 29.558,53.039 33.325,56.806 33.325,74.1 35.85,76.625 v1(36,76.625) ; 35.448,76.223 cw(c36,75.671) v1@36,76.452
CH5-1: P12.1 U2.16 | length 57.2
  Top Layer w0.203: v1(20.925,50.525) 21.65,51.25 U2.16@21.65,52.3 ; v1@20.925,50.698 ccw(c20.925,51.117) 21.221,50.821 ccw(c21.517,50.525) v1@21.098,50.525 ; v1(34.875,76.7) 35.6,77.425 35.6,85.125 37.1,86.625 P12.1@38.95,86.625 ; v1@34.875,76.873 ccw(c34.875,77.292) 35.171,76.996 ccw(c35.467,76.7) v1@35.048,76.7 ; P12.1@38.492,86.166 ccw(c37.385,85.06) 37.385,86.625 ccw(c37.385,88.19) P12.1@38.492,87.083 ; P12.1@38.635,86.31 ccw(c37.875,85.55) 37.875,86.625 ccw(c37.875,87.7) P12.1@38.635,86.94
  Bottom Layer w0.203: v1@20.802,50.648 ccw(c20.506,50.944) 20.925,50.944 ccw(c21.344,50.944) v1@21.048,50.648 ; v1(20.925,50.525) 20.925,51.278 23.042,53.394 29.411,53.394 32.969,56.953 32.969,74.794 v1(34.875,76.7) ; v1@34.702,76.7 cw(c34.283,76.7) 34.579,76.404 cw(c34.875,76.108) v1@34.875,76.527
CH6: P14.1 U2.18 | length 43.4
  Top Layer w0.203: U2.18@20.65,52.3 20.65,53.45 ; 20.707,53.507 ccw(c20.536,53.678) v1@20.778,53.678 ; v1@20.9,53.512 ccw(c20.826,53.274) 20.65,53.45 ; v1(20.951,53.678) 20.878,53.678 20.65,53.45
  Bottom Layer w0.203: P14.1@3.025,75.95 8.1,75.95 12.125,71.925 12.125,56.852 14.952,54.025 16.45,54.025 17.2,54.775 19.854,54.775 v1(20.951,53.678) ; P14.1@3.34,75.635 cw(c4.1,74.875) 4.1,75.95 cw(c4.1,77.025) P14.1@3.34,76.265 ; P14.1@3.483,75.492 cw(c4.59,74.385) 4.59,75.95 cw(c4.59,77.515) P14.1@3.483,76.409 ; v1@20.778,53.678 ccw(c20.359,53.678) 20.655,53.974 ccw(c20.951,54.27) v1@20.951,53.851
CH7: P15.1 U2.17 | length 45.1
  Top Layer w0.203: U2.17@21.15,52.3 21.15,53.025 21.875,53.75 v1(21.95,53.75) ; 21.526,53.401 cw(c21.95,52.977) v1@21.95,53.577 ; 21.707,53.582 ccw(c21.539,53.75) v1@21.777,53.75
  Bottom Layer w0.203: v1(21.95,53.75) 29.263,53.75 32.614,57.1 32.614,75.539 35.025,77.95 P15.1@38.95,77.95 ; v1@22.073,53.627 cw(c22.369,53.331) 22.369,53.75 cw(c22.369,54.169) v1@22.073,53.873 ; P15.1@38.492,77.492 ccw(c37.385,76.385) 37.385,77.95 ccw(c37.385,79.515) P15.1@38.492,78.409 ; P15.1@38.635,77.635 ccw(c37.875,76.875) 37.875,77.95 ccw(c37.875,79.025) P15.1@38.635,78.265
CHA0: R2.1 U1.6 U2.38 | length 39.2
  Top Layer w0.254: v1@17.08,19.695 cw(c17.356,19.419) 17.356,19.81 ; v1@17.08,19.905 ccw(c17.308,20.133) 17.308,19.81 ; v1@17.11,19.81 U1.6@18.521,19.81 20.04,19.81 ; U1.6@17.949,19.688 ccw(c17.653,19.392) 17.653,19.81 ccw(c17.653,20.228) U1.6@17.949,19.932 ; v1@18.045,45.67 cw(c17.793,45.418) 18.15,45.418 cw(c18.507,45.418) v1@18.255,45.67 ; U2.38@18.15,44.1 v1(18.15,45.775) ; U1.6@19.093,19.688 cw(c19.389,19.392) 19.389,19.81 cw(c19.389,20.228) U1.6@19.093,19.932 ; 20.273,19.577 ccw(c20.566,19.87) R2.1@20.775,19.512 20.338,19.512 ; R2.1@20.554,19.387 ccw(c20.338,19.263) 20.338,19.512 ; R2.1@20.554,19.638 cw(c20.338,19.762) 20.338,19.512 ; R2.1@20.647,19.732 cw(c20.394,20.164) 20.04,19.81 ; 20.04,19.81 20.338,19.512
  Bottom Layer w0.254: v1@16.925,19.8 16.925,21.825 16.15,22.6 16.15,43.4 18.15,45.4 v1(18.15,45.775) ; 16.925,20.278 ccw(c17.453,20.278) v1@17.08,19.905 ; 17.632,44.882 ccw(c16.739,45.775) v1@18.002,45.775 ; v1@18.045,45.67 cw(c17.793,45.418) 18.15,45.418 cw(c18.507,45.418) v1@18.255,45.67 ; 18.066,45.316 ccw(c17.607,45.775) v1@18.256,45.775
  other v1: 16.975,19.8
CHA1: R3.1 U1.7 U2.33 | length 40.7
  Top Layer w0.254: v1@16.175,21.327 cw(c16.175,20.97) 16.428,21.222 cw(c16.68,21.475) v1@16.323,21.475 ; v1(16.175,21.475) 16.55,21.1 18.501,21.1 U1.7@18.521,21.08 20.205,21.08 20.675,21.55 ; U2.33@16.3,46.95 18.2,46.95 v1(18.3,47.05) ; 17.605,21.1 cw(c17.605,20.614) U1.7@17.949,20.958 ; 17.702,21.1 ccw(c17.702,21.449) U1.7@17.949,21.202 ; 17.701,46.95 ccw(c17.701,47.649) v1@18.195,47.155 ; U1.7@19.093,20.958 cw(c19.389,20.662) 19.389,21.08 cw(c19.389,21.498) U1.7@19.093,21.202 ; R3.1@20.504,21.937 cw(c20.151,21.55) 20.675,21.55 ; R3.1@20.675,22.125 20.675,21.55 ; R3.1@20.846,21.937 ccw(c21.199,21.55) 20.675,21.55
  Bottom Layer w0.254: 15.852,21.898 cw(c15.428,21.475) v1@16.027,21.475 ; v1@16.25,21.5 15.675,22.075 15.675,46.35 16,46.675 17.625,46.675 ; 17.995,47.045 cw(c18.267,46.773) v1@18.312,47.155 ; v1@18.183,46.96 ccw(c18,46.82) 18,47.05 ; v1@18.183,47.14 cw(c18,47.28) 18,47.05 ; v1@18.283,46.903 ccw(c18.189,46.111) 17.625,46.675 ; v1(18.3,47.05) 18,47.05 ; 17.625,46.675 18,47.05
CSN: U2.25 U3.3 | length 20.8
  Top Layer w0.203: U2.25@16.3,50.95 16.3,55.575 17.625,56.9 v1(17.675,56.9) ; 17.294,56.569 cw(c17.675,56.187) v1@17.675,56.727 ; 17.414,56.689 ccw(c17.204,56.9) v1@17.502,56.9 ; U3.3@19.055,61.995 19.64,62.58 ; U3.3@19.171,62.474 ccw(c19.321,62.899) 19.64,62.58 ; U3.3@19.182,63.717 cw(c18.075,62.61) 19.64,62.61 cw(c21.205,62.61) U3.3@20.098,63.717 ; U3.3@19.325,63.86 cw(c18.565,63.1) 19.64,63.1 cw(c20.715,63.1) U3.3@19.955,63.86 ; U3.3@19.403,62.145 cw(c19.882,62.145) 19.544,62.484 ; U3.3@19.64,64.175 19.64,62.58
  Bottom Layer w0.203: v1(17.675,56.9) 19,58.225 19,60.64 U3.3@19.055,60.695 ; v1@17.675,57.073 ccw(c17.675,57.492) 17.971,57.196 ccw(c18.267,56.9) v1@17.848,56.9 ; U3.3@18.844,60.134 cw(c18.467,59.757) 19,59.757 ; 19,59.492 cw(c19.908,59.492) U3.3@19.266,60.134

## Text inside footprints (layer, text, board x,y; h text height)
U2: Top Overlay "STM32" at 21.55,48.6 h0.81 r180
U3: Bottom Overlay "GT-24" at 19.714,86.174 h2.2